# Altium PCB ESP8266_NODE.PcbDoc
Units mm, origin at the board's own origin, x right, y up, seen from the top; angles counter-clockwise.
Board outline 50 x 50 mm, 2 copper layers (Top Layer, Bottom Layer); 50 components, 47 nets, 178 pads, 2 vias.
Unrouted connection lines stored in the file: 120.
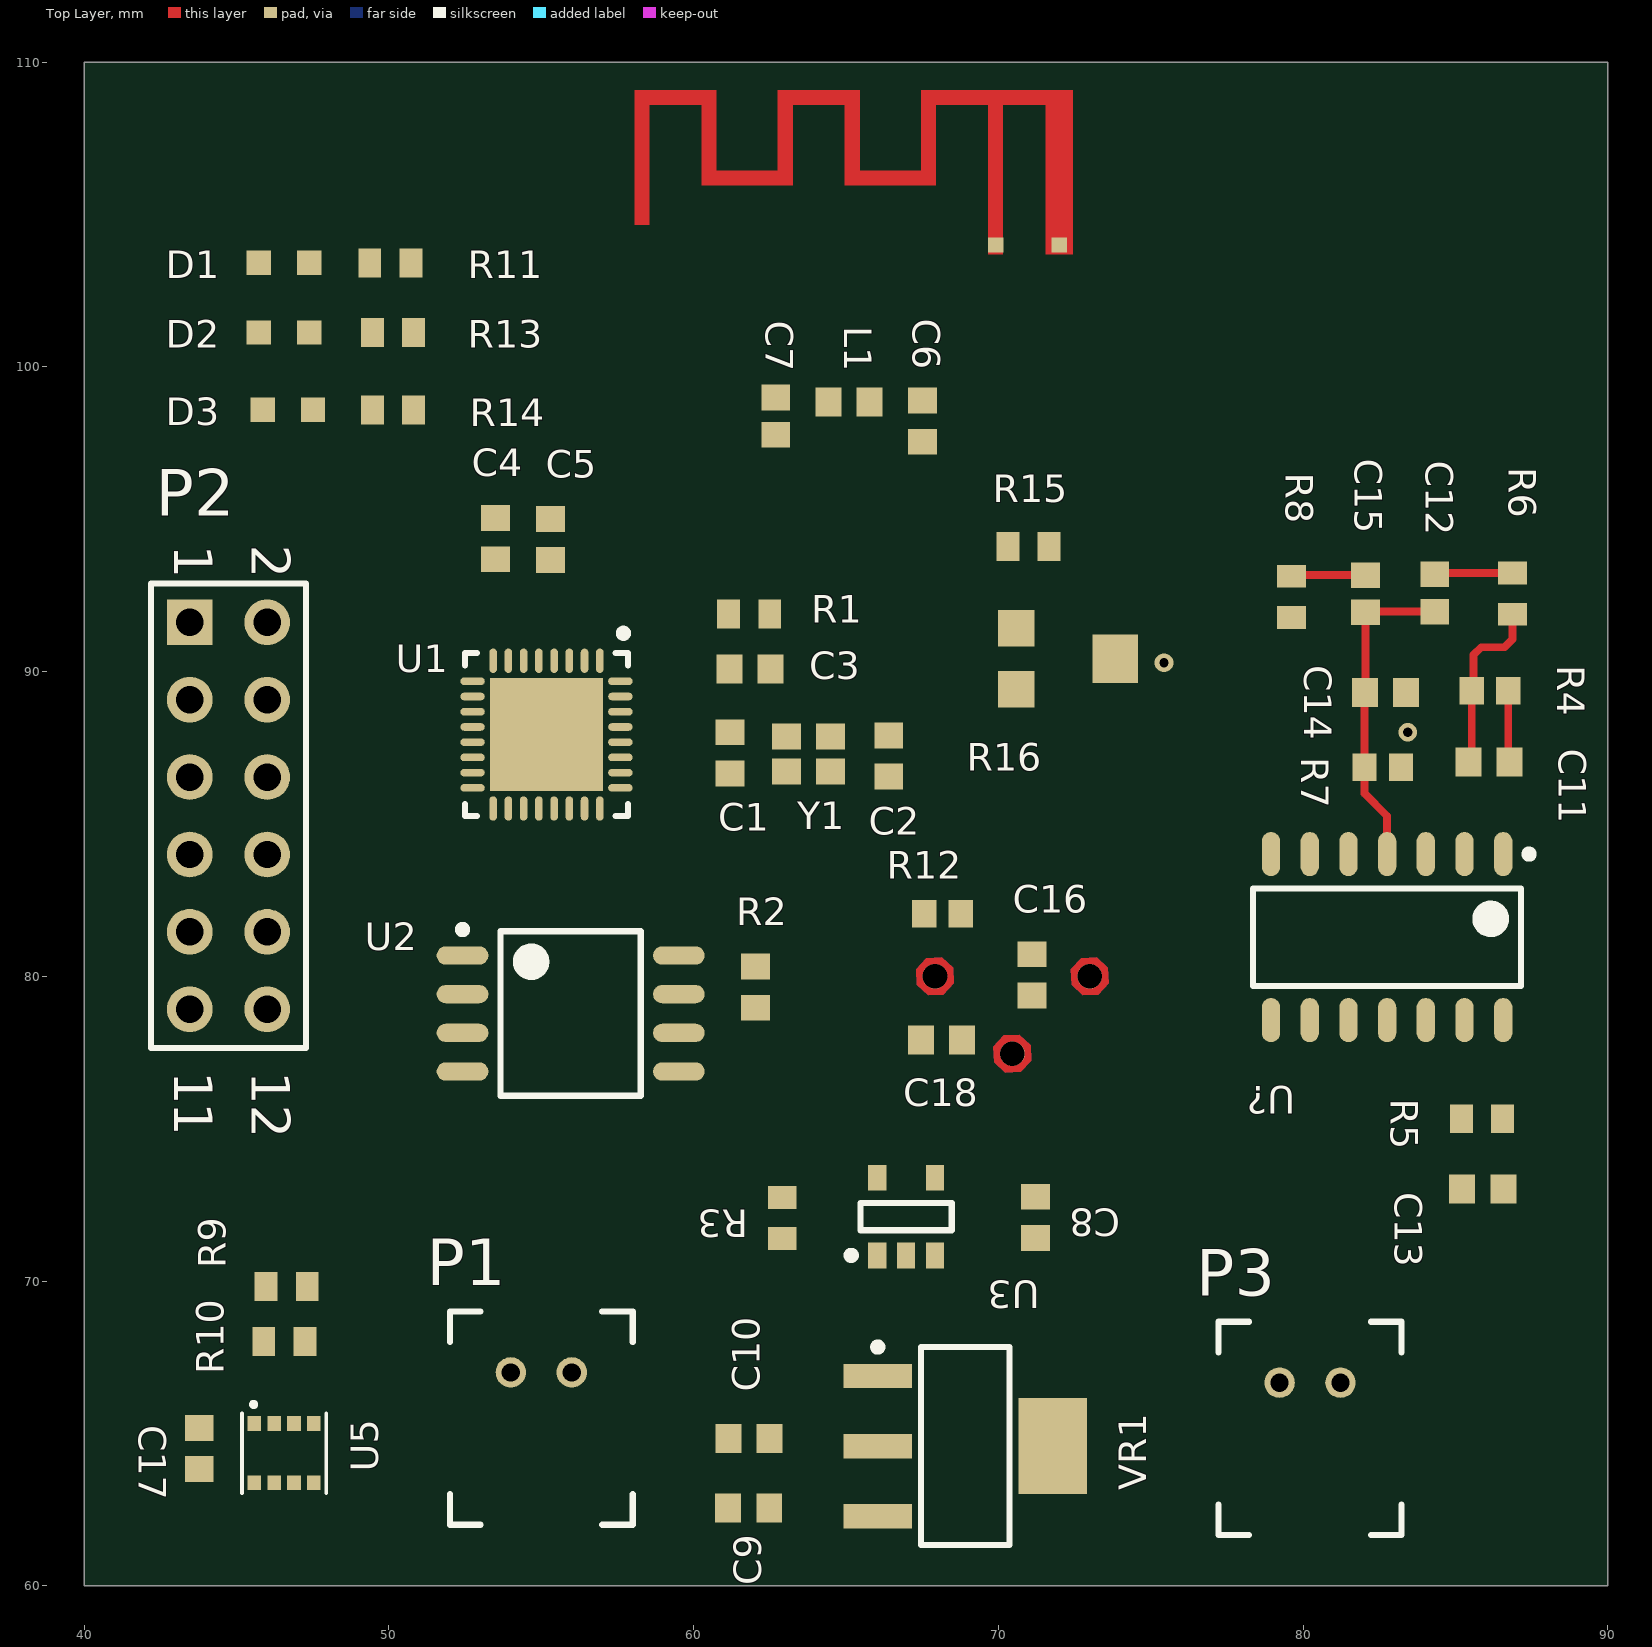
[diagram p0: Top Layer view]
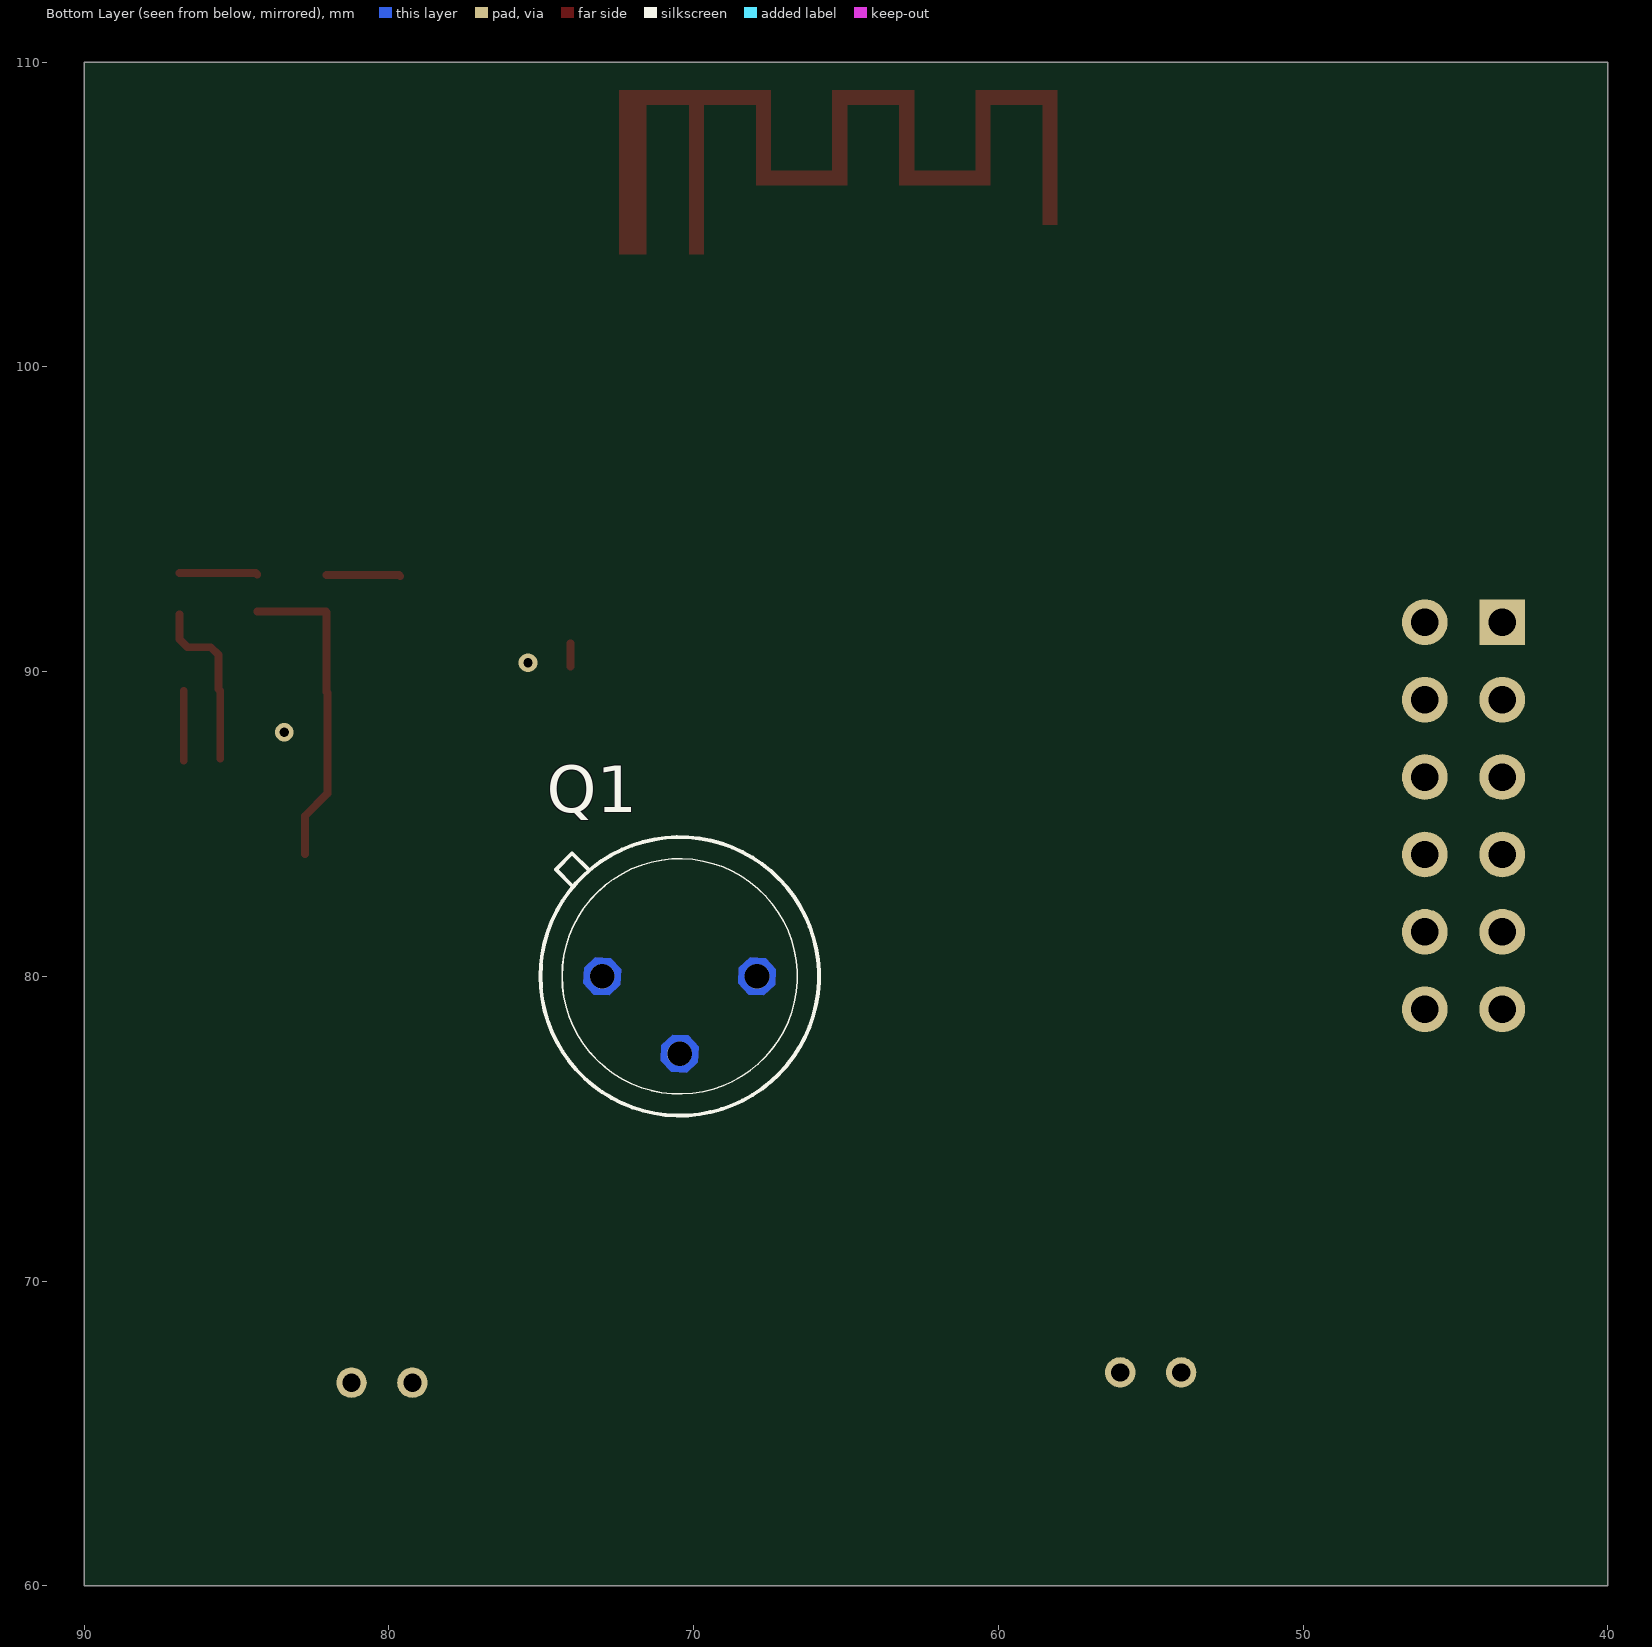
[diagram p1: Bottom Layer view, seen from below]

## Layer stack, top to bottom
Top Solder: solder mask 0.0102, Solder Resist, Dk 3.5
Top Layer: signal copper 0.0356
Dielectric 1: dielectric 0.32, FR-4, Dk 4.8
Bottom Layer: signal copper 0.0356
Bottom Solder: solder mask 0.0102, Solder Resist, Dk 3.5

## Board outline
40,60 90,60 90,110 40,110

## Design rules (kind name [scope] priority, off if disabled: settings)
Clearance [All] p1: gap=0.152 ignorepadtopadclearanceinfootprint=FALSE
HoleSize [All] p1: absolutevalues=TRUE maxlimit=6.3 minlimit=0.3 maxpercent=80.000 minpercent=20.000
MinimumSolderMaskSliver [All] p1: minsoldermaskwidth=0.2
PolygonConnect [All] p1: connectstyle=Relief reliefconductorwidth=0.254 reliefentries=4 polygonreliefangle="90 Angle" airgapwidth=0.254
RoutingVias [All] p1: holewidth=0.305 width=0.152 viastyle="Through Hole" minholewidth=0.305 minwidth=0.61 maxholewidth=6.3 maxwidth=6.3
ShortCircuit [All] p1: allowed=TRUE
SilkToSilkClearance [All] p1: silktosilkclearance=0.2
SilkToSolderMaskClearance [IsPad] p1: minsilkscreentomaskgap=0 clearancetoexposedcopper=TRUE
SolderMaskExpansion [All] p1: expansion=0.051
Width [All] p1: maxlimit=20 minlimit=0.152 preferedwidth=0.203
25 further rules are at their usual default settings.

## Classes and differential pairs
component class Sensor: C11 C12 C13 C14 C15 C16 C17 C18 D1 Q1 R4 R5 R6 R7 R8 R9 R10 R11 R12 R15 R16 U5 U?
component class MCU: C1 C2 C3 C4 C5 C6 C7 C8 C9 C10 D2 D3 L1 P1 P2 P3 R1 R2 R3 R13 R14 U1 U2 U3 VR1 Y1 ""

## Components (designator, comment, footprint, x,y, rotation, side; value= is the part's Value field where it differs from the comment)
C1 "6.8PF" CHIP2PINSM127P600-8N-SAMSUNG-0603 61.196,87.337 r90 top
C2 "6.8PF" CHIP2PINSM127P600-8N-SAMSUNG-0603 66.403,87.236 r270 top
C3 "1UF" CHIP2PINSM127P600-8N-SAMSUNG-0603 61.846,90.082 r0 top
C4 "10UF" CHIP2PINSM127P600-8N-SAMSUNG-0603 53.5,94.365 r90 top
C5 "0.1UF" CHIP2PINSM127P600-8N-SAMSUNG-0603 55.304,94.339 r270 top
C6 "2.4PF" CHIP2PINSM127P600-8N-SAMSUNG-0603 67.504,98.222 r270 top
C7 "3PF" CHIP2PINSM127P600-8N-TDK_0603 62.695,98.389 r270 top
C8 "1UF" CHIP2PINSM127P600-8N-SAMSUNG-0603 71.213,72.09 r270 top
C9 "0.1UF" CHIP2PINSM127P600-8N-SAMSUNG-0603 61.806,62.549 r180 top
C10 "10UF" CHIP2PINSM127P600-8N-SAMSUNG-0603 61.82,64.835 r180 top
C11 "10nF" CHIP2PINSM127P600-8N-SAMSUNG-0603 86.103,87.035 r0 top
C12 "33UF" CHIP2PINSM127P600-8N-TDK_0603 84.328,92.583 r90 top
C13 "0.1UF" CHIP2PINSM127P600-8N-SAMSUNG-0603 85.899,73.014 r0 top
C14 "10nF" CHIP2PINSM127P600-8N-SAMSUNG-0603 82.71,89.321 r180 top
C15 "33UF" CHIP2PINSM127P600-8N-TDK_0603 82.049,92.561 r270 top
C16 "0.1UF" CHIP2PINSM127P600-8N-SAMSUNG-0603 71.102,80.05 r90 top
C17 "0.1UF" CHIP2PINSM127P600-8N-SAMSUNG-0603 43.772,64.505 r270 top
C18 "0.1UF" CHIP2PINSM127P600-8N-SAMSUNG-0603 68.13,77.916 r0 top
D1 "SML-D12M8WT86" LED_0603_ROHM 47.377,103.418 r0 top
D2 "SML-D12M8WT86" LED_0603_ROHM 47.377,101.132 r0 top
D3 "SML-D12M8WT86" LED_0603_ROHM 47.505,98.592 r0 top
L1 "2.2NH" CHIP2PINSM127P600-8N-SAMSUNG-0603 65.1,98.846 r180 top
P1 "Header 2H" "PCBCOMPONENT_1 - DUPLICATE" 55,67 r180 top
P2 "Header 6X2" HDR2X6 43.46,91.62 r270 top
P3 "Header 2H" "PCBCOMPONENT_1 - DUPLICATE" 80.23,66.664 r180 top
P4 "" "PCBCOMPONENT_1 - DUPLICATE3" 58.055,103.695 r0 top
Q1 "ZRE200GE" TO5 70.46,80 r270 bottom
R1 "10K" CHIP2PINSM127P600-8N-VISHAY-0603 61.82,91.886 r0 top
R2 "200" CHIP2PINSM127P600-8N-SAMSUNG-0603 62.034,79.643 r270 top
R3 "10K" CHIP2PINSM127P600-8N-VISHAY-0603 62.907,72.065 r270 top
R4 "560K" CHIP2PINSM127P600-8N-STACKPOLE-0603 86.139,89.372 r0 top
R5 "220K" CHIP2PINSM127P600-8N-VISHAY-0603 85.874,75.325 r0 top
R6 "10K" CHIP2PINSM127P600-8N-VISHAY-0603 86.875,92.561 r270 top
R7 "560K" CHIP2PINSM127P600-8N-STACKPOLE-0603 82.618,86.857 r0 top
R8 "10K" CHIP2PINSM127P600-8N-VISHAY-0603 79.629,92.456 r270 top
R9 "4.7K" CHIP2PINSM127P600-8N-VISHAY-0603 46.642,69.816 r180 top
R10 "4.7K" CHIP2PINSM127P600-8N-VISHAY-0603 46.566,68.01 r180 top
R11 "1K" CHIP2PINSM127P600-8N-VISHAY-0603 50.045,103.418 r0 top
R12 "47K" CHIP2PINSM127P600-8N-0603-TE 68.171,82.056 r180 top
R13 "1K" CHIP2PINSM127P600-8N-VISHAY-0603 50.132,101.132 r0 top
R14 "1K" CHIP2PINSM127P600-8N-VISHAY-0603 50.132,98.592 r180 top
R15 "10K" CHIP2PINSM127P600-8N-VISHAY-0603 70.993,94.107 r180 top
R16 "" "PCBCOMPONENT_1 - DUPLICATE1" 72.39,90.424 r270 top value=1M
U1 "ESP8266EX" QFN127P600-8N 55.169,87.935 r270 top
U2 "IC FLASH 32M" SOIC127P600-8N-208 55.964,78.78 r0 top
U3 "IC BATT" SOT23127P600-8N-STC4054 66.971,72.116 r90 top
U5 "BME280" PSON65P250X250X100-8N 46.556,64.348 r90 top
U? "IC PIR DETECTOR" SOIC127P600-8N-PIRIC_NCS36000 82.761,81.287 r270 top (schematic designator U4)
VR1 "LD1117S33TR" SOT230P700X180-4N_ST 68.918,64.581 r0 top
Y1 "FA-128 26.0000MF10Z-W5" PCBCOMPONENT_1 63.773,87.303 r180 top

## Footprints (in the part's own frame and the unit in brackets; to place one, negate y for a bottom-side part, rotate by r counter-clockwise, add the part's x,y. Pads: shape width x height; smd on the part's side, far side on the other; paste and mask are expansions set on the pad)
CHIP2PINSM127P600-8N-0603-TE [mm]
  rect 0.8x0.9 smd: 1(-0.6,0) 2(0.6,0)
  body extent -0.8,-0.45 0.8,0.45, height 0.65
CHIP2PINSM127P600-8N-SAMSUNG-0603 [mm]
  rect 0.85x0.95 smd: 1(-0.675,0) 2(0.675,0)
  body extent -0.85,-0.45 0.85,0.45, height 0.9
CHIP2PINSM127P600-8N-STACKPOLE-0603 [mm]
  rect 0.8x0.9 smd: 1(-0.6,0) 2(0.6,0)
  body extent -0.8,-0.45 0.8,0.45, height 0.5
CHIP2PINSM127P600-8N-TDK_0603 [mm]
  rect 0.84x0.94 smd: 1(-0.61,0) 2(0.61,0)
  body extent -0.8,-0.45 0.8,0.45, height 0.9
CHIP2PINSM127P600-8N-VISHAY-0603 [mm]
  rect 0.75x0.95 smd: 1(-0.675,0) 2(0.675,0)
  body extent -0.82,-0.48 0.82,0.48, height 0.5
HDR2X6 [mm] "Connector; Header; 6x2 Position"
  rect 1.5x1.5 hole 0.9: 1(0,0)
  round 1.5 hole 0.9: 2(0,2.54) 3(2.54,0) 4(2.54,2.54) 5(5.08,0) 6(5.08,2.54) 7(7.62,0) 8(7.62,2.54) 9(10.16,0) 10(10.16,2.54) 11(12.7,0) 12(12.7,2.54)
  silkscreen extent -1.27,-1.27 13.97,3.81
LED_0603_ROHM [mm]
  rect 0.8x0.8 smd: 1(0,0) 2(-1.65,0)
  round 0.25 on Top Overlay: 3(-2.286,0.635)
  body extent -1.71,-0.34 -0.06,0.38, height 0.68
PCBCOMPONENT_1 [mm]
  rect 0.95x0.85 smd: 1(-0.725,-0.575) 2(0.725,-0.575) 3(0.725,0.575) 4(-0.725,0.575)
  round 0.5 on Top Overlay: 5(-1.25,-1.5)
  body extent -1.6,-1.25 1.6,1.25, height 1.1
"PCBCOMPONENT_1 - DUPLICATE" [mm]
  round 1 hole 0.6: 1(-1,0) 2(1,0)
  silkscreen extent -3,-2 3,5, body extent -3.9,-2 4,6.6, height 4.8
"PCBCOMPONENT_1 - DUPLICATE1" [mm]
  rect 1.2x1.2 smd: 1(-1,-1.8) 3(1,-1.8)
  rect 1.6x1.5 smd: 2(0,1.45)
  body extent -1.8,-1.91 1.8,2.05, height 1.13
"PCBCOMPONENT_1 - DUPLICATE3" [mm]
  rect 0.5x0.5 smd paste+0 mask+0: 1(11.862,0.305) 2(13.945,0.305)
  Top Layer region: 9.9,4.9 9.4,4.9 9.4,2.26 9.9,2.26
  Top Layer region: 7.4,5.4 4.7,5.4 4.7,4.9 7.4,4.9
  Top Layer region: 7.4,4.9 6.9,4.9 6.9,2.26 7.4,2.26
  Top Layer region: 5.2,4.9 4.7,4.9 4.7,2.26 5.2,2.26
  Top Layer region: 9.4,2.76 7.4,2.76 7.4,2.26 9.4,2.26
  Top Layer region: 2.7,5.4 0,5.4 0,4.9 2.7,4.9
  Top Layer region: 4.7,2.76 2.7,2.76 2.7,2.26 4.7,2.26
  Top Layer region: 2.7,4.9 2.2,4.9 2.2,2.26 2.7,2.26
  Top Layer region: 0.5,4.9 0,4.9 0,0.96 0.5,0.96
  Top Layer region: 14.4,5.4 9.4,5.4 9.4,4.9 14.4,4.9
  Top Layer region: 12.1,4.9 11.6,4.9 11.6,0 12.1,0
  Top Layer region: 14.4,4.9 13.5,4.9 13.5,0 14.4,0
PSON65P250X250X100-8N [mm]
  rect 0.49x0.45 smd: 1(0.97,0.975) 2(0.97,0.325) 3(0.97,-0.325) 4(0.97,-0.975) 5(-0.97,-0.975) 6(-0.97,-0.325) 7(-0.97,0.325) 8(-0.97,0.975)
  silkscreen extent -1.3,-1.39 1.65,1.38
QFN127P600-8N [mm] "ESP8266"
  oval 0.8x0.25 smd: 1(-2.425,1.75) 2(-2.425,1.25) 3(-2.425,0.75) 4(-2.425,0.25) 5(-2.425,-0.25) 6(-2.425,-0.75) 7(-2.425,-1.25) 8(-2.425,-1.75) 17(2.425,-1.75) 18(2.425,-1.25) 19(2.425,-0.75) 20(2.425,-0.25) 21(2.425,0.25) 22(2.425,0.75) 23(2.425,1.25) 24(2.425,1.75)
  oval 0.25x0.8 smd: 9(-1.75,-2.425) 10(-1.25,-2.425) 11(-0.75,-2.425) 12(-0.25,-2.425) 13(0.25,-2.425) 14(0.75,-2.425) 15(1.25,-2.425) 16(1.75,-2.425) 25(1.75,2.425) 26(1.25,2.425) 27(0.75,2.425) 28(0.25,2.425) 29(-0.25,2.425) 30(-0.75,2.425) 31(-1.25,2.425) 32(-1.75,2.425)
  rect 3.7x3.7 smd: 33(0,0)
  silkscreen extent -3.45,-2.68 2.67,2.67, body extent -2.52,-2.53 2.53,2.52, height 0.9
SOIC127P600-8N-208 [mm]
  oval 1.7x0.6 smd: 1(-3.55,1.905) 2(-3.55,0.635) 3(-3.55,-0.635) 4(-3.55,-1.905) 5(3.55,-1.905) 6(3.55,-0.635) 7(3.55,0.635) 8(3.55,1.905)
  silkscreen extent -3.67,-2.7 2.3,2.88, body extent -3.95,-2.7 3.95,2.7, height 1.75
SOIC127P600-8N-PIRIC_NCS36000 [mm]
  oval 1.45x0.6 smd: 1(-2.725,3.81) 2(-2.725,2.54) 3(-2.725,1.27) 4(-2.725,0) 5(-2.725,-1.27) 6(-2.725,-2.54) 7(-2.725,-3.81) 8(2.725,-3.81) 9(2.725,-2.54) 10(2.725,-1.27) 11(2.725,0) 12(2.725,1.27) 13(2.725,2.54) 14(2.725,3.81)
  silkscreen extent -2.85,-4.4 1.6,4.79, body extent -2,-4.4 2,4.4, height 1.75
SOT230P700X180-4N_ST [mm] "SOT223, 4-Leads, Body 6.40x7.00mm (avg), Pitch 2.30mm, IPC Medium Density"
  rect 2.25x0.8 smd: 1(-2.875,2.3) 2(-2.875,0) 3(-2.875,-2.3)
  rect 2.25x3.15 smd: 4(2.875,0)
  silkscreen extent -3,-3.25 1.45,3.37, body extent -1.75,-3.25 1.75,3.25, height 1.8
SOT23127P600-8N-STC4054 [mm]
  rect 0.85x0.6 smd: 1(-1.275,0.95) 2(-1.275,0) 3(-1.275,-0.95) 4(1.275,-0.95) 5(1.275,0.95)
  silkscreen extent -1.4,-1.5 0.45,1.92, body extent -1.3,-1.5 1.3,1.5, height 1.1
TO5 [mil]
  round 32 hole 32: 1(0,-100) 2(100,0) 3(0,100)
  Top Layer region: 24.43,-91.11 10.99,-76.44 -8.89,-75.57 -23.56,-89.01 -24.43,-108.89 -10.99,-123.56 8.89,-124.43 23.56,-110.99
  Top Layer region: 124.43,8.89 110.99,23.56 91.11,24.43 76.44,10.99 75.57,-8.89 89.01,-23.56 108.89,-24.43 123.56,-10.99
  Top Layer region: 24.43,108.89 10.99,123.56 -8.89,124.43 -23.56,110.99 -24.43,91.11 -10.99,76.44 8.89,75.57 23.56,89.01
  Bottom Layer region: 24.43,-91.11 10.99,-76.44 -8.89,-75.57 -23.56,-89.01 -24.43,-108.89 -10.99,-123.56 8.89,-124.43 23.56,-110.99
  Bottom Layer region: 124.43,8.89 110.99,23.56 91.11,24.43 76.44,10.99 75.57,-8.89 89.01,-23.56 108.89,-24.43 123.56,-10.99
  Bottom Layer region: 24.43,108.89 10.99,123.56 -8.89,124.43 -23.56,110.99 -24.43,91.11 -10.99,76.44 8.89,75.57 23.56,89.01
  Multi-Layer region: 24.43,-91.11 10.99,-76.44 -8.89,-75.57 -23.56,-89.01 -24.43,-108.89 -10.99,-123.56 8.89,-124.43 23.56,-110.99
  Multi-Layer region: 124.43,8.89 110.99,23.56 91.11,24.43 76.44,10.99 75.57,-8.89 89.01,-23.56 108.89,-24.43 123.56,-10.99
  Multi-Layer region: 24.43,108.89 10.99,123.56 -8.89,124.43 -23.56,110.99 -24.43,91.11 -10.99,76.44 8.89,75.57 23.56,89.01
  silkscreen extent -180,-180 180,180, body extent -179,-179 179,179, height 185

## Part data
C1 C2: library part CL10C6R8DB8NNNC, "CAP CER 6.8PF 50V C0G/NP0 0603", Manufacturer="Samsung Electro-Mechanics", Operating Temperature="-55°C ~ 125°C", Package / Case="0603 (1608 Metric)", Ratings=-, Supplier Part Number 1=1276-2334-1-ND, Temperature Coefficient="C0G, NP0", Tolerance=±0.5pF, Voltage - Rated=50V, Applications="General Purpose", Category=Capacitors, ComponentLink1Description=http://www.samsungsem.com/kr/support/product-search/mlcc/CL10C6R8DB8NNNC.jsp, ComponentLink1URL=http://www.samsungsem.com/kr/support/product-search/mlcc/CL10C6R8DB8NNNC.jsp, Features=-, Height - Seated (Max)=-, Lead Spacing=-, Lead Style=-, Manufacturer Part Number=CL10C6R8DB8NNNC, Mounting Type="Surface Mount, MLCC", Notification="Current market demand for these product types have resulted in fluctuating and extending lead times. Lead times may differ.", Packaging="Cut Tape (CT)", Part Status=Active, Pricing 1="1=0.08, 10=0.039, 100=0.0174, 500=0.01244, 1000=0.00978 (EUR)", RoHS="RoHS Compliant", Size / Dimension="0.063\" L x 0.031\" W (1.60mm x 0.80mm)", Stock 1=40000, Supplier 1=Digi-Key, Thickness (Max)="0.035\" (0.90mm)"
C3 C8: library part CL10B105KP8NNNC, "CAP CER 1UF 10V X7R 0603", Manufacturer="Samsung Electro-Mechanics", Operating Temperature="-55°C ~ 125°C", Package / Case="0603 (1608 Metric)", Ratings=-, Supplier Part Number 1=1276-1946-1-ND, Temperature Coefficient=X7R, Tolerance=±10%, Voltage - Rated=10V, Applications="General Purpose", Category=Capacitors, ComponentLink1Description=http://www.samsungsem.com/kr/support/product-search/mlcc/CL10B105KP8NNNC.jsp, ComponentLink1URL=http://www.samsungsem.com/kr/support/product-search/mlcc/CL10B105KP8NNNC.jsp, Features=-, Height - Seated (Max)=-, Lead Spacing=-, Lead Style=-, Manufacturer Part Number=CL10B105KP8NNNC, Mounting Type="Surface Mount, MLCC", Notification="Current market demand for these product types have resulted in fluctuating and extending lead times. Lead times may differ.", Packaging="Cut Tape (CT)", Part Status=Active, Pricing 1="1=0.08, 10=0.044, 100=0.0197, 500=0.01408, 1000=0.01106 (EUR)", RoHS="RoHS Compliant", Size / Dimension="0.063\" L x 0.031\" W (1.60mm x 0.80mm)", Stock 1=40000, Supplier 1=Digi-Key, Thickness (Max)="0.035\" (0.90mm)"
C4 C10: library part CL10A106KQ8NNNC, "CAP CER 10UF 6.3V X5R 0603", Manufacturer="Samsung Electro-Mechanics", Operating Temperature="-55°C ~ 85°C", Package / Case="0603 (1608 Metric)", Ratings=-, Supplier Part Number 1=1276-1038-1-ND, Temperature Coefficient=X5R, Tolerance=±10%, Voltage - Rated=6.3V, Applications="General Purpose", Category=Capacitors, ComponentLink1Description=http://www.samsungsem.com/kr/support/product-search/mlcc/CL10A106KQ8NNNC.jsp, ComponentLink1URL=http://www.samsungsem.com/kr/support/product-search/mlcc/CL10A106KQ8NNNC.jsp, Features=-, Height - Seated (Max)=-, Lead Spacing=-, Lead Style=-, Manufacturer Part Number=CL10A106KQ8NNNC, Mounting Type="Surface Mount, MLCC", Notification="Current market demand for these product types have resulted in fluctuating and extending lead times. Lead times may differ.", Packaging="Cut Tape (CT)", Part Status=Active, Pricing 1="1=0.25, 10=0.177, 100=0.1001, 500=0.07064, 1000=0.0618 (EUR)", RoHS="RoHS Compliant", Size / Dimension="0.063\" L x 0.031\" W (1.60mm x 0.80mm)", Stock 1=40000, Supplier 1=Digi-Key, Thickness (Max)="0.035\" (0.90mm)"
C5 C9 C13 C16 C17 C18: library part CL10F104ZO8NNNC, "CAP CER 0.1UF 16V Y5V 0603", Manufacturer="Samsung Electro-Mechanics", Operating Temperature="-30°C ~ 85°C", Package / Case="0603 (1608 Metric)", Ratings=-, Supplier Part Number 1=1276-1258-1-ND, Temperature Coefficient="Y5V (F)", Tolerance="-20%, +80%", Voltage - Rated=16V, Applications="General Purpose", Category=Capacitors, ComponentLink1Description=http://www.samsungsem.com/kr/support/product-search/mlcc/CL10F104ZO8NNNC.jsp, ComponentLink1URL=http://www.samsungsem.com/kr/support/product-search/mlcc/CL10F104ZO8NNNC.jsp, Features=-, Height - Seated (Max)=-, Lead Spacing=-, Lead Style=-, Manufacturer Part Number=CL10F104ZO8NNNC, Mounting Type="Surface Mount, MLCC", Notification="Current market demand for these product types have resulted in fluctuating and extending lead times. Lead times may differ.", Packaging="Cut Tape (CT)", Part Status=Active, Pricing 1="1=0.08, 10=0.032, 100=0.0144, 500=0.01026, 1000=0.00806 (EUR)", RoHS="RoHS Compliant", Size / Dimension="0.063\" L x 0.031\" W (1.60mm x 0.80mm)", Stock 1=40000, Supplier 1=Digi-Key, Thickness (Max)="0.035\" (0.90mm)"
C6: library part CL10C2R4BB8NNNC, "CAP CER 2.4PF 50V C0G/NP0 0603", Manufacturer="Samsung Electro-Mechanics", Operating Temperature="-55°C ~ 125°C", Package / Case="0603 (1608 Metric)", Ratings=-, Supplier Part Number 1=1276-2254-1-ND, Temperature Coefficient="C0G, NP0", Tolerance=±0.1pF, Voltage - Rated=50V, Applications="General Purpose", Category=Capacitors, ComponentLink1Description=http://www.samsungsem.com/kr/support/product-search/mlcc/CL10C2R4BB8NNNC.jsp, ComponentLink1URL=http://www.samsungsem.com/kr/support/product-search/mlcc/CL10C2R4BB8NNNC.jsp, Features=-, Height - Seated (Max)=-, Lead Spacing=-, Lead Style=-, Manufacturer Part Number=CL10C2R4BB8NNNC, Mounting Type="Surface Mount, MLCC", Notification="Current market demand for these product types have resulted in fluctuating and extending lead times. Lead times may differ.", Packaging="Cut Tape (CT)", Part Status=Active, Pricing 1="1=0.08, 10=0.034, 100=0.0151, 500=0.01074, 1000=0.00844 (EUR)", RoHS="RoHS Compliant", Size / Dimension="0.063\" L x 0.031\" W (1.60mm x 0.80mm)", Stock 1=40000, Supplier 1=Digi-Key, Thickness (Max)="0.035\" (0.90mm)"
C7: library part CL10C030BB8NNNC, "CAP CER 3PF 50V C0G/NP0 0603", Manufacturer="Samsung Electro-Mechanics", Operating Temperature="-55°C ~ 125°C", Package / Case="0603 (1608 Metric)", Ratings=-, Supplier Part Number 1=1276-2125-1-ND, Temperature Coefficient="C0G, NP0", Tolerance=±0.1pF, Voltage - Rated=50V, Applications="General Purpose", Category=Capacitors, ComponentLink1Description=http://www.samsungsem.com/kr/support/product-search/mlcc/CL10C030BB8NNNC.jsp, ComponentLink1URL=http://www.samsungsem.com/kr/support/product-search/mlcc/CL10C030BB8NNNC.jsp, Features=-, Height - Seated (Max)=-, Lead Spacing=-, Lead Style=-, Manufacturer Part Number=CL10C030BB8NNNC, Mounting Type="Surface Mount, MLCC", Notification="Current market demand for these product types have resulted in fluctuating and extending lead times. Lead times may differ.", Packaging="Cut Tape (CT)", Part Status=Active, Pricing 1="1=0.08, 10=0.026, 100=0.0116, 500=0.00826, 1000=0.00649 (EUR)", RoHS="RoHS Compliant", Size / Dimension="0.063\" L x 0.031\" W (1.60mm x 0.80mm)", Stock 1=40000, Supplier 1=Digi-Key, Thickness (Max)="0.035\" (0.90mm)"
C11 C14: library part CL10B103KB8NCNC, "CAP CER 10000PF 50V X7R 0603", Manufacturer="Samsung Electro-Mechanics", Operating Temperature="-55°C ~ 125°C", Package / Case="0603 (1608 Metric)", Ratings=-, Supplier Part Number 1=1276-1921-1-ND, Temperature Coefficient=X7R, Tolerance=±10%, Voltage - Rated=50V, Applications="General Purpose", Category=Capacitors, ComponentLink1Description=http://www.samsungsem.com/kr/support/product-search/mlcc/CL10B103KB8NCNC.jsp, ComponentLink1URL=http://www.samsungsem.com/kr/support/product-search/mlcc/CL10B103KB8NCNC.jsp, Features=-, Height - Seated (Max)=-, Lead Spacing=-, Lead Style=-, Manufacturer Part Number=CL10B103KB8NCNC, Mounting Type="Surface Mount, MLCC", Packaging="Cut Tape (CT)", Part Status=Active, Pricing 1="1=0.09, 10=0.029, 100=0.0129, 500=0.00926, 1000=0.00728 (EUR)", RoHS="RoHS Compliant", Size / Dimension="0.063\" L x 0.031\" W (1.60mm x 0.80mm)", Stock 1=1066876, Supplier 1=Digi-Key, Thickness (Max)="0.035\" (0.90mm)"
C12 C15: library part C2012X5R0J336M125AC, "CAP CER 33UF 6.3V X5R 0805", Manufacturer="TDK Corporation", Operating Temperature="-55°C ~ 85°C", Package / Case="0805 (2012 Metric)", Ratings=-, Supplier Part Number 1=445-5986-6-ND, Temperature Coefficient=X5R, Tolerance=±20%, Voltage - Rated=6.3V, Applications="General Purpose", Category=Capacitors, ComponentLink1Description=https://product.tdk.com/info/en/catalog/datasheets/mlcc_commercial_general_en.pdf, ComponentLink1URL=https://product.tdk.com/info/en/catalog/datasheets/mlcc_commercial_general_en.pdf, Failure Rate=-, Features="Low ESL", Height - Seated (Max)=-, Lead Spacing=-, Lead Style=-, Manufacturer Part Number=C2012X5R0J336M125AC, Mounting Type="Surface Mount, MLCC", Notification="Current market demand for these product types have resulted in fluctuating and extending lead times. Lead times may differ.", Packaging=Digi-Reel®, Part Status=Active, Pricing 1="1=0.86, 10=0.654, 100=0.4676, 500=0.362, 1000=0.31172 (EUR)", RoHS="RoHS Compliant", Size / Dimension="0.079\" L x 0.049\" W (2.00mm x 1.25mm)", Stock 1=20000, Supplier 1=Digi-Key, Thickness (Max)="0.057\" (1.45mm)"
D1 D2 D3: "LED GREEN DIFFUSED 0603 SMD", Base Part Number=SML-D12, Color=Green, Current - Test=20mA, Lens Color=White, Manufacturer="Rohm Semiconductor", Millicandela Rating=25mcd, Package / Case="0603 (1608 Metric)", Voltage - Forward (Vf) (Typ)=2.2V, Category=Optoelectronics, ComponentLink1Description=https://www.rohm.com/datasheet/SML-D12V8W, ComponentLink1URL=https://www.rohm.com/datasheet/SML-D12V8W, Configuration=Standard, Features=-, Height (Max)=0.65mm, Lens Size="1.20mm x 0.80mm", Lens Style="Rectangle with Flat Top", Lens Transparency=Diffused, Manufacturer Part Number=SML-D12M8WT86, Mounting Type="Surface Mount", Packaging="Cut Tape (CT)", Part Status=Active, Pricing 1="1=0.3, 10=0.219, 25=0.1616, 100=0.1154, 250=0.07848, 500=0.06926, 1000=0.05425 (EUR)", RoHS="RoHS Compliant", Size / Dimension="1.60mm L x 0.80mm W", Stock 1=315568, Supplier 1=Digi-Key, Supplier Device Package="0603 (1608 Metric)", Viewing Angle=-, Wavelength - Dominant=572nm, Wavelength - Peak=-
L1: library part L-14C2N2SV4T, "FIXED IND 2.2NH 300MA 150 MOHM", Current - Saturation=-, DC Resistance (DCR)="150 mOhm Max", Frequency - Self Resonant=12GHz, Manufacturer="Johanson Technology Inc.", Operating Temperature="-40°C ~ 100°C", Package / Case="0603 (1608 Metric)", Q @ Freq="8 @ 100MHz", Supplier Part Number 1=712-1427-1-ND, Tolerance=±0.3nH, Category="Inductors, Coils, Chokes", ComponentLink1Description=https://media.digikey.com/pdf/Data%20Sheets/Johanson%20Technology/RF_Ceramic_Chip_Inductors.pdf, ComponentLink1URL=https://media.digikey.com/pdf/Data%20Sheets/Johanson%20Technology/RF_Ceramic_Chip_Inductors.pdf, Height - Seated (Max)="0.037\" (0.95mm)", Manufacturer Part Number=L-14C2N2SV4T, Material - Core=Ceramic, Mounting Type="Surface Mount", Packaging="Cut Tape (CT)", Part Status=Active, Pricing 1="1=0.08, 10=0.052, 100=0.0348, 500=0.02898, 1000=0.02434 (EUR)", Ratings=-, RoHS="RoHS Compliant", Shielding=Unshielded, Size / Dimension="0.063\" L x 0.031\" W (1.60mm x 0.80mm)", Stock 1=17153, Supplier 1=Digi-Key, Supplier Device Package="0603 (1608 Metric)", Type=Multilayer
P1 P3: "Header, 2-Pin, Right Angle", LatestRevisionDate=17-Jul-2002, LatestRevisionNote="Re-released for DXP Platform.", Publisher="Altium Limited"
P2: "Header, 6-Pin, Dual row", LatestRevisionDate=17-Jul-2002, LatestRevisionNote="Re-released for DXP Platform.", Publisher="Altium Limited"
P4: library part SMB, "SMB Straight Connector", LatestRevisionDate=17-Jul-2002, LatestRevisionNote="Re-released for DXP Platform.", Publisher="Altium Limited"
Q1: "Zmotion Pir Sensor Dual Element", Package="TO-5-3 Zilog", Digi-Key_Part_Number=269-4955-ND, Digi-Key_Purchase_URL=https://www.digikey.com/product-detail/en/zilog/ZRE200GE/269-4955-ND/5147335?utm_source=snapeda&utm_medium=aggregator&utm_campaign=symbol, MF=Zilog, MP=ZRE200GE, SnapEDA_Link=https://www.snapeda.com/parts/ZRE200GE/Zilog/view-part/?ref=snap
R1 R3 R6 R8 R15: library part MCT06030C1002FP500, "RES SMD 10K OHM 1% 1/8W 0603", Manufacturer="Vishay Beyschlag", Operating Temperature="-55°C ~ 155°C", Package / Case="0603 (1608 Metric)", Power (Watts)="0.125W, 1/8W", Supplier Device Package=0603, Supplier Part Number 1=MCT0603-10.0K-CFCT-ND, Temperature Coefficient=±50ppm/°C, Tolerance=±1%, Category=Resistors, ComponentLink1Description=http://www.vishay.com/docs/28705/mcx0x0xpro.pdf, ComponentLink1URL=http://www.vishay.com/docs/28705/mcx0x0xpro.pdf, Composition="Thin Film", Failure Rate=-, Features=Anti-Sulfur, Height - Seated (Max)="0.022\" (0.55mm)", Manufacturer Part Number=MCT06030C1002FP500, Packaging="Cut Tape (CT)", Part Status=Active, Pricing 1="1=0.16, 10=0.133, 100=0.0521, 1000=0.02182, 2500=0.02 (EUR)", RoHS="RoHS Compliant", Size / Dimension="0.061\" L x 0.033\" W (1.55mm x 0.85mm)", Stock 1=1201929, Supplier 1=Digi-Key
R2: library part RC1608F201CS, "RES SMD 200 OHM 1% 1/10W 0603", Manufacturer="Samsung Electro-Mechanics", Operating Temperature="-55°C ~ 155°C", Package / Case="0603 (1608 Metric)", Power (Watts)="0.1W, 1/10W", Supplier Device Package=0603, Supplier Part Number 1=1276-4584-1-ND, Temperature Coefficient=±100ppm/°C, Tolerance=±1%, Category=Resistors, ComponentLink1Description=http://www.samsungsem.com/kr/support/product-search/chip-resistor/RC1608F201CS.jsp, ComponentLink1URL=http://www.samsungsem.com/kr/support/product-search/chip-resistor/RC1608F201CS.jsp, Composition="Thick Film", Failure Rate=-, Features="Moisture Resistant", Height - Seated (Max)="0.022\" (0.55mm)", Manufacturer Part Number=RC1608F201CS, Packaging="Cut Tape (CT)", Part Status=Active, Pricing 1="1=0.08, 10=0.028, 100=0.0115, 1000=0.00516, 2500=0.00448 (EUR)", RoHS="RoHS Compliant", Size / Dimension="0.063\" L x 0.032\" W (1.60mm x 0.80mm)", Stock 1=235074, Supplier 1=Digi-Key
R4 R7: library part ERJ-3EKF5603V, "RES SMD 560K OHM 1% 1/10W 0603", Manufacturer="Panasonic Electronic Components", Operating Temperature="-55°C ~ 155°C", Package / Case="0603 (1608 Metric)", Power (Watts)="0.1W, 1/10W", Supplier Device Package=0603, Supplier Part Number 1=P560KHCT-ND, Temperature Coefficient=±100ppm/°C, Tolerance=±1%, Category=Resistors, ComponentLink1Description=https://industrial.panasonic.com/cdbs/www-data/pdf/RDA0000/AOA0000C304.pdf, ComponentLink1URL=https://industrial.panasonic.com/cdbs/www-data/pdf/RDA0000/AOA0000C304.pdf, Composition="Thick Film", Failure Rate=-, Features="Automotive AEC-Q200", Height - Seated (Max)="0.022\" (0.55mm)", Manufacturer Part Number=ERJ-3EKF5603V, Packaging="Cut Tape (CT)", Part Status=Active, Pricing 1="1=0.09, 10=0.057, 100=0.0231, 1000=0.01037, 2500=0.009 (EUR)", RoHS="RoHS Compliant", Size / Dimension="0.063\" L x 0.032\" W (1.60mm x 0.80mm)", Stock 1=221508, Supplier 1=Digi-Key
R5: library part CRCW0603220KFKEAC, "RES SMD 220K OHM 1% 1/10W 0603", Manufacturer="Vishay Dale", Operating Temperature="-55°C ~ 155°C", Package / Case="0603 (1608 Metric)", Power (Watts)="0.1W, 1/10W", Supplier Device Package=0603, Supplier Part Number 1=541-4039-1-ND, Temperature Coefficient=±100ppm/°C, Tolerance=±1%, Category=Resistors, ComponentLink1Description=http://www.vishay.com/docs/28773/crcwce3.pdf, ComponentLink1URL=http://www.vishay.com/docs/28773/crcwce3.pdf, Composition="Thick Film", Failure Rate=-, Features=-, Height - Seated (Max)="0.022\" (0.55mm)", Manufacturer Part Number=CRCW0603220KFKEAC, Packaging="Cut Tape (CT)", Part Status=Active, Pricing 1="1=0.09, 10=0.026, 100=0.0108, 1000=0.00484, 2500=0.0042 (EUR)", RoHS="RoHS Compliant", Stock 1=154470, Supplier 1=Digi-Key
R9 R10: library part CRCW06034K70JNEAC, "RES SMD 4.7K OHM 5% 1/10W 0603", Manufacturer="Vishay Dale", Operating Temperature="-55°C ~ 155°C", Package / Case="0603 (1608 Metric)", Power (Watts)="0.1W, 1/10W", Supplier Device Package=0603, Supplier Part Number 1=541-3993-6-ND, Temperature Coefficient=±200ppm/°C, Tolerance=±5%, Category=Resistors, ComponentLink1Description=http://www.vishay.com/docs/28773/crcwce3.pdf, ComponentLink1URL=http://www.vishay.com/docs/28773/crcwce3.pdf, Composition="Thick Film", Failure Rate=-, Features=-, Height - Seated (Max)="0.022\" (0.55mm)", Manufacturer Part Number=CRCW06034K70JNEAC, Packaging=Digi-Reel®, Part Status=Active, Pricing 1="1=0.09, 10=0.019, 100=0.008, 1000=0.00357, 2500=0.0031 (EUR)", RoHS="RoHS Compliant", Stock 1=819006, Supplier 1=Digi-Key
R11 R13 R14: library part MCT06030C1001FP500, "RES SMD 1K OHM 1% 1/8W 0603", Manufacturer="Vishay Beyschlag", Operating Temperature="-55°C ~ 155°C", Package / Case="0603 (1608 Metric)", Power (Watts)="0.125W, 1/8W", Supplier Device Package=0603, Supplier Part Number 1=MCT0603-1.00K-CFCT-ND, Temperature Coefficient=±50ppm/°C, Tolerance=±1%, Category=Resistors, ComponentLink1Description=http://www.vishay.com/docs/28705/mcx0x0xpro.pdf, ComponentLink1URL=http://www.vishay.com/docs/28705/mcx0x0xpro.pdf, Composition="Thin Film", Failure Rate=-, Features=Anti-Sulfur, Height - Seated (Max)="0.022\" (0.55mm)", Manufacturer Part Number=MCT06030C1001FP500, Packaging="Cut Tape (CT)", Part Status=Active, Pricing 1="1=0.16, 10=0.133, 100=0.0521, 1000=0.02182, 2500=0.02 (EUR)", RoHS="RoHS Compliant", Size / Dimension="0.061\" L x 0.033\" W (1.55mm x 0.85mm)", Stock 1=193422, Supplier 1=Digi-Key
R12: library part CRGCQ0603F47K, "CRGCQ 0603 47K 1%", Manufacturer="TE Connectivity Passive Product", Operating Temperature="-55°C ~ 155°C", Package / Case="0603 (1608 Metric)", Power (Watts)="0.1W, 1/10W", Supplier Device Package=0603, Supplier Part Number 1=A129708CT-ND, Temperature Coefficient=±100ppm/°C, Tolerance=±1%, Category=Resistors, ComponentLink1Description=https://www.te.com/commerce/DocumentDelivery/DDEController?Action=srchrtrv&DocNm=1773204-3&DocType=DS&DocLang=English, ComponentLink1URL=https://www.te.com/commerce/DocumentDelivery/DDEController?Action=srchrtrv&DocNm=1773204-3&DocType=DS&DocLang=English, Composition="Thick Film", Failure Rate=-, Features="Automotive AEC-Q200, Moisture Resistant", Height - Seated (Max)="0.022\" (0.55mm)", Manufacturer Part Number=CRGCQ0603F47K, Packaging="Cut Tape (CT)", Part Status=Active, Pricing 1="1=0.09, 10=0.026, 100=0.0106, 1000=0.00474, 2500=0.00411 (EUR)", RoHS="RoHS Compliant", Size / Dimension="0.063\" L x 0.031\" W (1.60mm x 0.80mm)", Stock 1=50, Supplier 1=Digi-Key
R16: library part "Res Tap", "Tapped Resistor", Manufacturer="Bourns Inc.", Manufacturer Part Number=TC33X-2-105E, Power (Watts)="0.1W, 1/10W", Resistive Material=Cermet, Supplier Part Number 1=TC33X-2-105ECT-ND, Temperature Coefficient=±250ppm/°C, Tolerance=±25%, Adjustment Type="Top Adjustment", Category="Potentiometers, Variable Resistors", ComponentLink1Description=https://www.bourns.com/docs/Product-Datasheets/TC33.pdf, ComponentLink1URL=https://www.bourns.com/docs/Product-Datasheets/TC33.pdf, LatestRevisionDate=17-Jul-2002, LatestRevisionNote="Re-released for DXP Platform.", Mounting Type="Surface Mount", PackageDescription="Variable Resistor, Thru-Hole; 3 Leads", PackageReference=VR3, Packaging="Cut Tape (CT)", Part Status=Active, Pricing 1="1=0.24, 10=0.242, 25=0.2188, 50=0.2088, 100=0.202, 250=0.18852, 500=0.1717, 1000=0.15486 (EUR)", Published=24-Mar-1999, Publisher="Altium Limited", RoHS="RoHS Compliant", Set Position=0.5, Sim Note="Enter the Resistance value and the set point into parameter fields.", Size / Dimension="Rectangular - 0.150\" x 0.142\" Face x 0.047\" H (3.80mm x 3.60mm x 1.20mm)", Stock 1=32075, Supplier 1=Digi-Key, Termination Style="J Lead"
U1: "SMD IC ESP8266EX, QFN32-PIN, 5_5", Current - Receiving="50mA ~ 56mA", Current - Transmitting="120mA ~ 170mA", Frequency=2.4GHz, Manufacturer="Espressif Systems", Package / Case="32-VFQFN Exposed Pad", Power - Output=20dBm, Supplier Part Number 1=1904-1001-1-ND, Voltage - Supply="2.5 V ~ 3.6 V", Category="RF/IF and RFID", ComponentLink1Description=https://espressif.com/sites/default/files/documentation/0a-esp8266ex_datasheet_en.pdf, ComponentLink1URL=https://espressif.com/sites/default/files/documentation/0a-esp8266ex_datasheet_en.pdf, Data Rate (Max)=54Mbps, Manufacturer Part Number=ESP8266EX, Memory Size=-, Modulation=-, Packaging="Cut Tape (CT)", Part Status=Active, Pricing 1="1=2.49, 10=2.222, 25=2, 100=1.8223, 250=1.64452, 500=1.47562 (EUR)", Protocol=802.11b/g/n, RF Family/Standard=WiFi, RoHS="RoHS Compliant", Sensitivity=-91dBm, Serial Interfaces="I²C, I²S, SPI, UART", Stock 1=2122, Supplier 1=Digi-Key, Type="TxRx + MCU"
U2: library part "W25Q32JVSSIQ TR", "IC FLASH 32M SPI 133MHZ 8SOIC", Manufacturer="Winbond Electronics", Operating Temperature="-40°C ~ 85°C (TA)", Package / Case="8-SOIC (0.209\", 5.30mm Width)", Supplier Device Package=8-SOIC, Supplier Part Number 1=W25Q32JVSSIQCT-ND, Voltage - Supply="2.7 V ~ 3.6 V", Category="Integrated Circuits (ICs)", ComponentLink1Description=http://www.winbond.com/resource-files/w25q32jv%20revg%2003272018%20plus.pdf, ComponentLink1URL=http://www.winbond.com/resource-files/w25q32jv%20revg%2003272018%20plus.pdf, Manufacturer Part Number="W25Q32JVSSIQ TR", Memory Format=FLASH, Memory Interface="SPI - Quad I/O", Memory Size="32Mb (4M x 8)", Memory Type=Non-Volatile, Mounting Type="Surface Mount", Packaging="Cut Tape (CT)", Part Status=Active, Pricing 1="1=0.83, 10=0.753, 25=0.7428, 50=0.739, 100=0.6606, 250=0.65488, 500=0.64536, 750=0.63545, 1000=0.62208 (EUR)", RoHS="RoHS Compliant", Stock 1=102739, Supplier 1=Digi-Key, Technology="FLASH - NOR", Write Cycle Time - Word, Page=3ms
U3: library part STC4054GR, "IC BATT CHRGR 800MA TSOT23-5", Base Part Number=STC4054, Battery Pack Voltage=4.2V, Charge Current - Max=800mA, Current - Charging="Constant - Programmable", Manufacturer=STMicroelectronics, Operating Temperature="-40°C ~ 85°C (TA)", Package / Case="SOT-23-5 Thin, TSOT-23-5", Supplier Device Package=TSOT-23-5, Supplier Part Number 1=497-5809-6-ND, Voltage - Supply (Max)=6.5V, Battery Chemistry=Lithium-Ion, Category="Integrated Circuits (ICs)", ComponentLink1Description=http://www.st.com/content/ccc/resource/technical/document/datasheet/df/b9/e6/5b/ec/92/45/ed/CD00132951.pdf/files/CD00132951.pdf/jcr:content/translations/en.CD00132951.pdf, ComponentLink1URL=http://www.st.com/content/ccc/resource/technical/document/datasheet/df/b9/e6/5b/ec/92/45/ed/CD00132951.pdf/files/CD00132951.pdf/jcr:content/translations/en.CD00132951.pdf, Fault Protection=-, Interface=-, Manufacturer Part Number=STC4054GR, Number of Cells=1, Packaging=Digi-Reel®, Part Status=Active, Pricing 1="1=1.35, 10=1.208, 100=0.9707, 500=0.7975, 1000=0.66079 (EUR)", Programmable Features=Current, RoHS="RoHS Compliant", Stock 1=11621, Supplier 1=Digi-Key
U5: "Integrated pressure, humidity and temperature sensor; 8-pin 2.5x2.5x0.93mm LGA", Package="LGA-8 Bosch", Digi-Key_Part_Number=828-1063-1-ND, Digi-Key_Purchase_URL=https://www.digikey.es/product-detail/en/bosch-sensortec/BME280/828-1063-1-ND/6136314?utm_source=snapeda&utm_medium=aggregator&utm_campaign=symbol, MF=Bosch, MP=BME280, SnapEDA_Link=https://www.snapeda.com/parts/BME280/Bosch%20Sensortec/view-part/?ref=snap
U?: library part NCS36000DG, "IC PIR DETECTOR CTLR 14SOIC", Base Part Number=NCS36000, Manufacturer="ON Semiconductor", Operating Temperature="-40°C ~ 85°C", Package / Case="14-SOIC (0.154\", 3.90mm Width)", Supplier Device Package=14-SOIC, Supplier Part Number 1=NCS36000DGOS-ND, Category="Integrated Circuits (ICs)", ComponentLink1Description=http://www.onsemi.com/pub/Collateral/NCS36000-D.PDF, ComponentLink1URL=http://www.onsemi.com/pub/Collateral/NCS36000-D.PDF, Input Type=Digital, Interface=CMOS, Manufacturer Part Number=NCS36000DG, Mounting Type="Surface Mount", Output Type=Digital, Packaging=Tray, Part Status=Active, Pricing 1="1=0.75, 55=0.63655, 110=0.52291, 550=0.43195, 1045=0.34101 (EUR)", RoHS="RoHS Compliant", Stock 1=566, Supplier 1=Digi-Key, Type="Detector Controller"
VR1: "IC REG LINEAR 3.3V 800MA SOT223", Base Part Number=LD1117, Current - Output=800mA, Manufacturer=STMicroelectronics, Operating Temperature="0°C ~ 125°C", Package / Case="TO-261-4, TO-261AA", Supplier Device Package=SOT-223, Supplier Part Number 1=497-1242-1-ND, Voltage - Input (Max)=15V, Voltage - Output (Max)=-, Voltage - Output (Min/Fixed)=3.3V, Voltage Dropout (Max)="1.2V @ 800mA", Category="Integrated Circuits (ICs)", ComponentLink1Description=http://www.st.com/content/ccc/resource/technical/document/datasheet/99/3b/7d/91/91/51/4b/be/CD00000544.pdf/files/CD00000544.pdf/jcr:content/translations/en.CD00000544.pdf, ComponentLink1URL=http://www.st.com/content/ccc/resource/technical/document/datasheet/99/3b/7d/91/91/51/4b/be/CD00000544.pdf/files/CD00000544.pdf/jcr:content/translations/en.CD00000544.pdf, Control Features=-, Manufacturer Part Number=LD1117S33TR, Mounting Type="Surface Mount", Output Configuration=Positive, Output Type=Fixed, Packaging="Cut Tape (CT)", Part Status=Active, Pricing 1="1=0.37, 10=0.316, 100=0.2358, 500=0.18526, 1000=0.14317 (EUR)", Protection Features="Over Current, Over Temperature", PSRR="75dB (120Hz)", RoHS="RoHS Compliant", Stock 1=10, Supplier 1=Digi-Key
Y1: "CRYSTAL 26.0000MHZ 12PF SMD", Frequency Stability=±10ppm, Load Capacitance=12pF, Manufacturer=EPSON, Operating Mode=Fundamental, Operating Temperature="-20°C ~ 75°C", Package / Case="4-SMD, No Lead", Ratings=-, Supplier Part Number 1=SER4186CT-ND, Category="Crystals, Oscillators, Resonators", ComponentLink1Description=https://support.epson.biz/td/api/doc_check.php?dl=brief_FA-128&lang=en, ComponentLink1URL=https://support.epson.biz/td/api/doc_check.php?dl=brief_FA-128&lang=en, Frequency Tolerance=±10ppm, Height - Seated (Max)="0.020\" (0.50mm)", Manufacturer Part Number="FA-128 26.0000MF10Z-W5", Mounting Type="Surface Mount", Packaging="Cut Tape (CT)", Part Status=Active, Pricing 1="1=0.5, 10=0.419, 50=0.3772, 100=0.3353, 500=0.3185, 1000=0.2682 (EUR)", RoHS="RoHS Compliant", Size / Dimension="0.079\" L x 0.063\" W (2.00mm x 1.60mm)", Stock 1=200409, Supplier 1=Digi-Key, Type="MHz Crystal"

## Via types
v1: diameter 0.61, hole 0.305, Top Layer to Bottom Layer, 2 vias

## Nets (pads, with @x,y where several pads share a name; then routed paths per layer and width w, separated by ;. In a path a pad name is that pad's centre, name@x,y a point inside that pad or via, vN(x,y) a via of type N, cw(c..) or ccw(c..) an arc to the next point about the centre after c; other vN are vias at no path point)
3v3: C3.1 C4.1 C5.2 C10.1 C17.2 P2.1 R5.2 R9.2 R10.2 R11.2 R13.2 U1.1 U1.3 U1.4 U1.11 U1.17 U1.29 U1.30 U5.2 U5.6 U5.8 U?.10 U?.12 U?.14 VR1.2
ANT: C6.1 L1.1 P4.1
CH_PU: R14.2 U1.7
GND: C1.2 C2.2 C3.2 C4.2 C5.1 C6.2 C7.2 C8.2 C9.2 C10.2 C13.2 C16.1 C17.1 C18.2 D2.2 D3.2 P1.2 P2.2 P3.2 P4.2 Q1.3 R1.2 R3.2 R8.2 R12.1 R15.1 U2.4 U3.2 U5.1 U5.5 U5.7 U?.7 VR1.1 Y1.2 Y1.4
GPIO2: P2.11 U1.14
GPIO16: P2.5 U1.8
LED: D1.2 U?.9
LNA: C7.1 L1.2 U1.2
MTCK: P2.9 U1.12
MTDI: P2.8 U1.10
MTDO: P2.10 U1.13
MTMS: P2.7 U1.9
NetC11_1: C11.1 R4.1 R6.2 U?.2
NetC11_2: C11.2 R4.2 U?.1
NetC12_1: C12.1 R16.3
NetC12_2: C12.2 R6.1
NetC13_1: C13.1 R5.1 U?.13
NetC14_1: C14.1 R7.2 R16.2 U?.3
NetC14_2: C14.2 C15.2 R7.1 U?.4
NetC15_1: C15.1 R8.1
NetD1_1: D1.1 R11.1
NetD2_1: D2.1 R13.1
NetD3_1: D3.1 R14.1
NetR1_1: R1.1 U1.31
NetR2_1: R2.1 U1.21
NetR3_1: R3.1 U3.5
NetR9_1: R9.1 U1.16 U5.3
NetR10_1: R10.1 U1.15 U5.4
NetR15_2: R15.2 R16.1
NetU1_24: U1.24 U?.8
OP1_P: C18.1 Q1.2 R12.2 U?.5
RST: P2.3 U1.32
SCK/CLK: R2.2 U2.6
SCS/CMD: U1.20 U2.1
SDI/SD1: U1.23 U2.5
SDO/SD0: U1.22 U2.2
SHD/SD3: U1.18 U2.7
SWP/SD3: U1.19 U2.3
TOUT: P2.6 U1.6
URXD: U1.25
UTXD: U1.26
VBAT: C9.1 P1.1 U3.3 VR1.3
VCC: U2.8
VIN: C8.1 P3.1 U3.4
VREF: C16.2 Q1.1 U?.6
XTAL_IN: C2.1 U1.28 Y1.1
XTAL_OUT: C1.1 U1.27 Y1.3
pads on no net: D1.3 D2.3 D3.3 P2.4 P2.12 U1.5 U1.33 U3.1 U?.11 VR1.4 Y1.5
copper on no net: | length 24.3
  Top Layer w0.254: 74.041,90.17 74.041,90.932 ; 79.629,93.131 79.669,93.171 82.049,93.171 ; 82.761,84.012 82.761,85.26 82.018,86.003 82.018,89.304 82.049,89.335 82.049,91.951 82.071,91.973 84.328,91.973 ; 84.328,93.193 84.371,93.236 86.875,93.236 ; 85.539,87.146 85.539,89.372 85.598,89.431 85.598,90.551 85.852,90.805 86.614,90.805 86.875,91.066 86.875,91.886 ; 86.739,87.074 86.739,89.372
  other v1: 83.439,88.011 75.438,90.297

## Text inside footprints (layer, text, board x,y; h text height)
P2: Top Overlay "12" at 45.492,76.888 h1.27 r270; Top Overlay "1" at 42.952,75.872 h1.27 r270; Top Overlay "1" at 42.952,76.888 h1.27 r270; Top Overlay "1" at 42.952,94.16 h1.27 r270; Top Overlay "2" at 45.492,94.16 h1.27 r270